# Altium PCB xiaoban.PcbDoc (part 1 of 2)
Units mm, origin at the board's own origin, x right, y up, seen from the top; angles counter-clockwise.
Board outline 80.34 x 99.39 mm, 2 copper layers (Top Layer, Bottom Layer); 120 components, 25 nets, 528 pads, 380 vias.
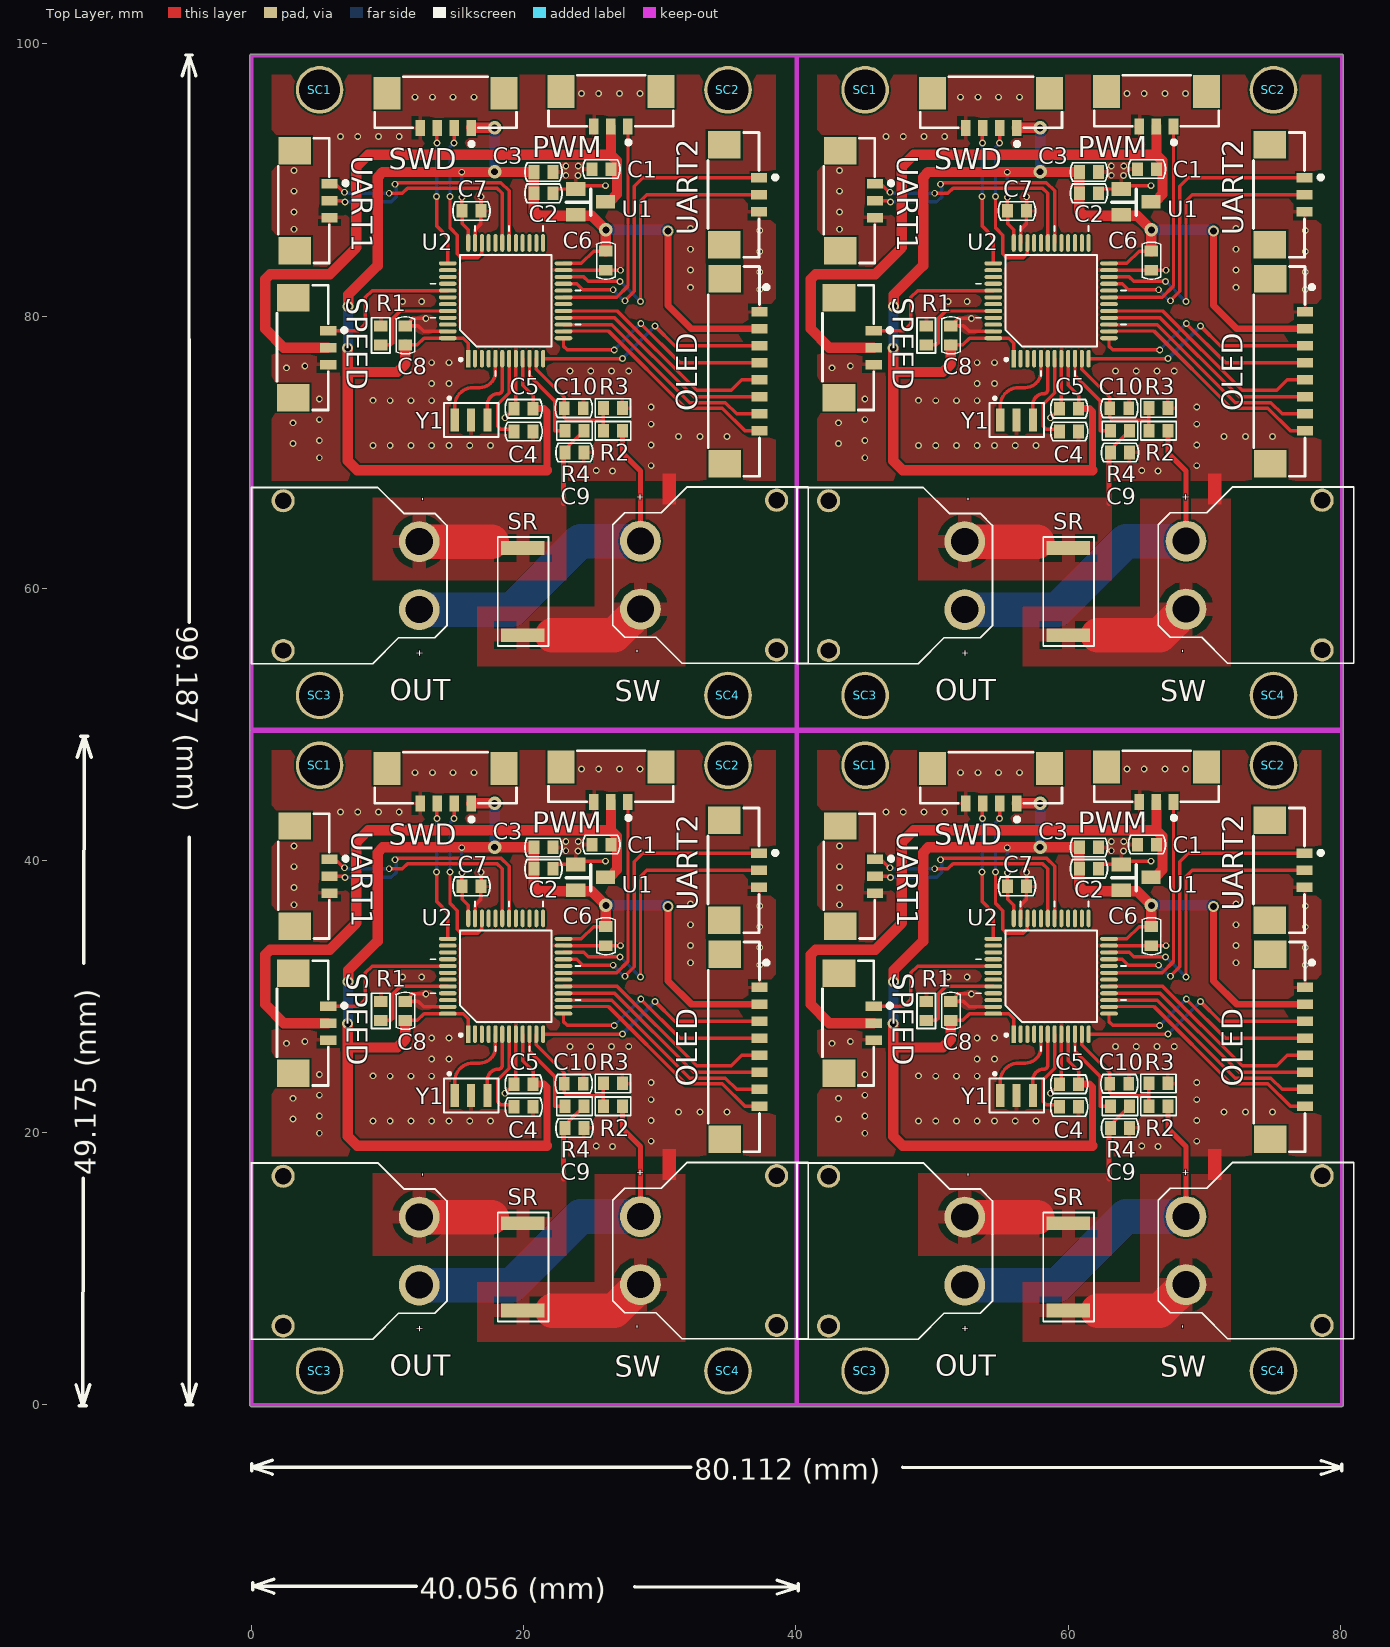
[diagram p0: Top Layer view]
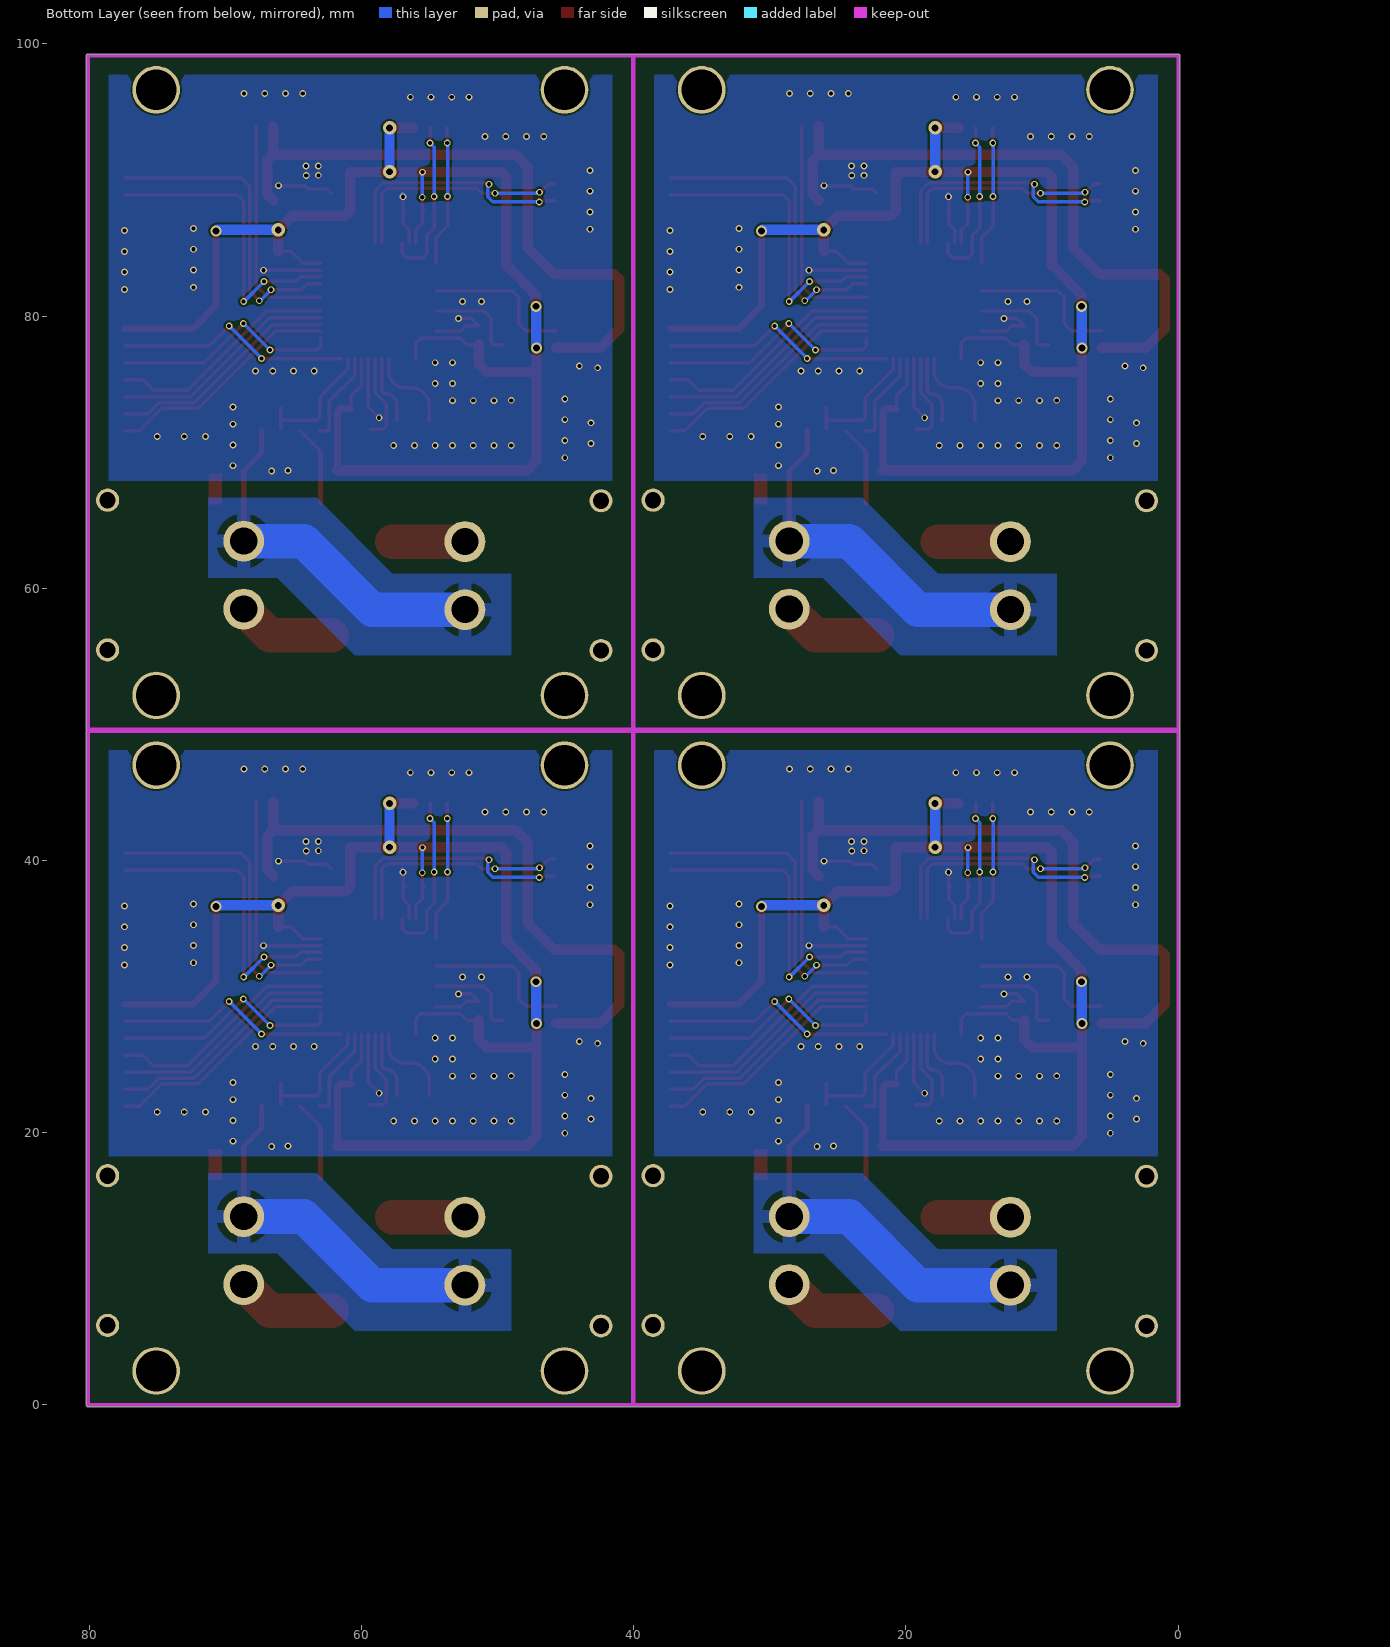
[diagram p1: Bottom Layer view, seen from below]

## Layer stack, top to bottom
Top Solder: solder mask 0.0102, Solder Resist, Dk 3.5
Top Layer: signal copper 0.0356
Dielectric 1: dielectric 0.32, FR-4, Dk 4.8
Bottom Layer: signal copper 0.0356
Bottom Solder: solder mask 0.0102, Solder Resist, Dk 3.5

## Board outline
-0.127,0 -0.127,49.5 cw(c0,49.5) -0.109,49.566 cw(c0,49.632) -0.127,49.632 -0.127,99.132 cw(c0,99.132) 0,99.259 40,99.259 cw(c40,99.132) 40.041,99.252 cw(c40.081,99.132) 40.081,99.259 80.081,99.259 cw(c80.081,99.132) 80.209,99.132 80.209,49.632 cw(c80.081,49.632) 80.19,49.566 cw(c80.081,49.5) 80.209,49.5 80.209,0 cw(c80.081,0) 80.081,-0.127 40.081,-0.127 cw(c40.081,0) 40.041,-0.121 cw(c40,0) 40,-0.127 0,-0.127 cw(c0,0)

## Design rules (kind name [scope] priority, off if disabled: settings)
Clearance [All] p1: gap=0.152
ComponentClearance [All] p1: gap=0 collisioncheckmode=3 verticalgap=0 showdistances=FALSE
HoleSize [All] p1: absolutevalues=TRUE maxlimit=5 minlimit=0.025 maxpercent=80.000 minpercent=20.000
HoleToHoleClearance [All] p1: gap=0.152 allowstackedmicrovias=TRUE
MinimumSolderMaskSliver [All] p1: minsoldermaskwidth=0
PolygonConnect PolygonConnect_3 [All vs IsVia] p1: connectstyle=Direct reliefconductorwidth=0.254 reliefentries=4 polygonreliefangle="90 Angle" airgapwidth=0.254
PolygonConnect PolygonConnect_2 [All vs (HasFootprint('R2512') OR HasFootprint('TX30-m'))] p2: connectstyle=Relief reliefconductorwidth=1.016 reliefentries=4 polygonreliefangle="90 Angle" airgapwidth=0.508
PolygonConnect PolygonConnect_1 [All vs (InNet('ADC_I') OR InNet('VCC12V'))] p3: connectstyle=Relief reliefconductorwidth=1.27 reliefentries=4 polygonreliefangle="90 Angle" airgapwidth=0.508
PolygonConnect [All] p4: connectstyle=Relief reliefconductorwidth=0.254 reliefentries=4 polygonreliefangle="90 Angle" airgapwidth=0.254
RoutingVias [All] p1: holewidth=0.3 width=0.5 viastyle="Through Hole" minholewidth=0.3 minwidth=0.5 maxholewidth=0.711 maxwidth=1.27
SilkToSilkClearance [All] p1: silktosilkclearance=0
SilkToSolderMaskClearance [IsPad] p1: minsilkscreentomaskgap=0 clearancetoexposedcopper=TRUE
SolderMaskExpansion [All] p1: expansion=0.102
Width [All] p1: maxlimit=5.08 minlimit=0.152 preferedwidth=0.254
24 further rules are at their usual default settings.

## Classes and differential pairs
component class liuyang: C1 C2 C3 C4 C5 C6 C7 C8 C9 C10 OLED OUT PWM R1 R2 R3 R4 SC1 SC2 SC3 SC4 SPEED SR SW SWD U1 U2 UART1 UART2 Y1

## Components (designator, comment, footprint, x,y, rotation, side; value= is the part's Value field where it differs from the comment)
C1 "100n" C0603 65.786,41.173 r180 top
C1 "100n" C0603 65.786,90.805 r180 top
C1 "100n" C0603 25.705,90.805 r180 top
C1 "100n" C0603 25.705,41.173 r180 top
C2 "100n" C0603 61.524,39.387 r0 top
C2 "100n" C0603 61.524,89.019 r0 top
C2 "100n" C0603 21.442,89.019 r0 top
C2 "100n" C0603 21.442,39.387 r0 top
C3 "10UF" C0603 61.524,40.962 r180 top
C3 "10UF" C0603 61.524,90.594 r180 top
C3 "10UF" C0603 21.442,90.594 r180 top
C3 "10UF" C0603 21.442,40.962 r180 top
C4 "0.1uF" C0603 60.071,21.895 r180 top
C4 "0.1uF" C0603 60.071,71.526 r180 top
C4 "0.1uF" C0603 19.99,71.526 r180 top
C4 "0.1uF" C0603 19.99,21.895 r180 top
C5 "10UF" C0603 60.071,23.571 r0 top
C5 "10UF" C0603 60.071,73.203 r0 top
C5 "10UF" C0603 19.99,73.203 r0 top
C5 "10UF" C0603 19.99,23.571 r0 top
C6 "0.1uF" C0603 66.116,34.442 r90 top
C6 "0.1uF" C0603 66.116,84.074 r90 top
C6 "0.1uF" C0603 26.035,84.074 r90 top
C6 "0.1uF" C0603 26.035,34.442 r90 top
C7 "0.1uF" C0603 56.236,38.1 r180 top
C7 "0.1uF" C0603 56.236,87.732 r180 top
C7 "0.1uF" C0603 16.154,87.732 r180 top
C7 "0.1uF" C0603 16.154,38.1 r180 top
C8 "0.1uF" C0603 51.384,28.956 r270 top
C8 "0.1uF" C0603 51.384,78.588 r270 top
C8 "0.1uF" C0603 11.303,78.588 r270 top
C8 "0.1uF" C0603 11.303,28.956 r270 top
C9 "0.1uF" C0603 63.805,20.345 r180 top
C9 "0.1uF" C0603 63.805,69.977 r180 top
C9 "0.1uF" C0603 23.724,69.977 r180 top
C9 "0.1uF" C0603 23.724,20.345 r180 top
C10 "0.1uF" C0603 63.754,23.597 r180 top
C10 "0.1uF" C0603 63.754,73.228 r180 top
C10 "0.1uF" C0603 23.673,73.228 r180 top
C10 "0.1uF" C0603 23.673,23.597 r180 top
OLED "OLED" DF13-1.25-8A 76.124,26.314 r270 top (schematic designator P0)
OLED "OLED" DF13-1.25-8A 76.124,75.946 r270 top (schematic designator P0)
OLED "OLED" DF13-1.25-8A 36.043,75.946 r270 top (schematic designator P0)
OLED "OLED" DF13-1.25-8A 36.043,26.314 r270 top (schematic designator P0)
OUT "TX60" TX30-M 52.4,11.303 r90 top
OUT "TX60" TX30-M 52.4,60.935 r90 top
OUT "TX60" TX30-M 12.319,60.935 r90 top
OUT "TX60" TX30-M 12.319,11.303 r90 top
PWM "Header 3" DF13-1.25-3A 65.862,45.593 r180 top
PWM "Header 3" DF13-1.25-3A 65.862,95.225 r180 top
PWM "Header 3" DF13-1.25-3A 25.781,95.225 r180 top
PWM "Header 3" DF13-1.25-3A 25.781,45.593 r180 top
R1 "10K" R0603 49.581,28.956 r270 top
R1 "10K" R0603 49.581,78.588 r270 top
R1 "10K" R0603 9.5,78.588 r270 top
R1 "10K" R0603 9.5,28.956 r270 top
R2 "10K" R0603 66.635,21.946 r180 top
R2 "10K" R0603 66.635,71.577 r180 top
R2 "10K" R0603 26.554,71.577 r180 top
R2 "10K" R0603 26.554,21.946 r180 top
R3 "10K" R0603 66.624,23.622 r0 top
R3 "10K" R0603 66.624,73.254 r0 top
R3 "10K" R0603 26.543,73.254 r0 top
R3 "10K" R0603 26.543,23.622 r0 top
R4 "10K" R0603 63.805,21.946 r180 top
R4 "10K" R0603 63.805,71.577 r180 top
R4 "10K" R0603 23.724,71.577 r180 top
R4 "10K" R0603 23.724,21.946 r180 top
SC1 "M3" SCRREW_M3 45.081,47 r0 top
SC1 "M3" SCRREW_M3 45.081,96.632 r0 top
SC1 "M3" SCRREW_M3 5,96.632 r0 top
SC1 "M3" SCRREW_M3 5,47 r0 top
SC2 "M3" SCRREW_M3 75.081,47 r0 top
SC2 "M3" SCRREW_M3 75.081,96.632 r0 top
SC2 "M3" SCRREW_M3 35,96.632 r0 top
SC2 "M3" SCRREW_M3 35,47 r0 top
SC3 "M3" SCRREW_M3 45.081,2.5 r0 top
SC3 "M3" SCRREW_M3 45.081,52.132 r0 top
SC3 "M3" SCRREW_M3 5,52.132 r0 top
SC3 "M3" SCRREW_M3 5,2.5 r0 top
SC4 "M3" SCRREW_M3 75.081,2.5 r0 top
SC4 "M3" SCRREW_M3 75.081,52.132 r0 top
SC4 "M3" SCRREW_M3 35,52.132 r0 top
SC4 "M3" SCRREW_M3 35,2.5 r0 top
SPEED "Header 3" DF13-1.25-3A 44.435,27.425 r270 top
SPEED "Header 3" DF13-1.25-3A 44.435,77.056 r270 top
SPEED "Header 3" DF13-1.25-3A 4.353,77.056 r270 top
SPEED "Header 3" DF13-1.25-3A 4.353,27.425 r270 top
SR "0.33R" R2512 60.02,13.335 r270 top
SR "0.33R" R2512 60.02,62.967 r270 top
SR "0.33R" R2512 19.939,62.967 r270 top
SR "0.33R" R2512 19.939,13.335 r270 top
SW "TX30" TX30-M 68.656,11.343 r270 top locked
SW "TX30" TX30-M 68.656,60.975 r270 top locked
SW "TX30" TX30-M 28.575,60.975 r270 top locked
SW "TX30" TX30-M 28.575,11.343 r270 top locked
SWD "CON4" DF13-1.25-4A 54.335,45.476 r180 top
SWD "CON4" DF13-1.25-4A 54.335,95.108 r180 top
SWD "CON4" DF13-1.25-4A 14.254,95.108 r180 top
SWD "CON4" DF13-1.25-4A 14.254,45.476 r180 top
U1 "3.3V" SOT23 64.999,38.76 r270 top
U1 "3.3V" SOT23 64.999,88.392 r270 top
U1 "3.3V" SOT23 24.917,88.392 r270 top
U1 "3.3V" SOT23 24.917,38.76 r270 top
U2 "STM32F103C8" ST_LQFP48 58.75,31.496 r90 top
U2 "STM32F103C8" ST_LQFP48 58.75,81.128 r90 top
U2 "STM32F103C8" ST_LQFP48 18.669,81.128 r90 top
U2 "STM32F103C8" ST_LQFP48 18.669,31.496 r90 top
UART1 "Header 3" DF13-1.25-3A 44.526,38.227 r270 top
UART1 "Header 3" DF13-1.25-3A 44.526,87.859 r270 top
UART1 "Header 3" DF13-1.25-3A 4.445,87.859 r270 top
UART1 "Header 3" DF13-1.25-3A 4.445,38.227 r270 top
UART2 "Header 3" DF13-1.25-3A 76.098,38.659 r270 top
UART2 "Header 3" DF13-1.25-3A 76.098,88.29 r270 top
UART2 "Header 3" DF13-1.25-3A 36.017,88.29 r270 top
UART2 "Header 3" DF13-1.25-3A 36.017,38.659 r270 top
Y1 "CSTCE8M00G55R0" CRYSMD3.2X1.3 56.21,22.733 r0 top
Y1 "CSTCE8M00G55R0" CRYSMD3.2X1.3 56.21,72.365 r0 top
Y1 "CSTCE8M00G55R0" CRYSMD3.2X1.3 16.129,72.365 r0 top
Y1 "CSTCE8M00G55R0" CRYSMD3.2X1.3 16.129,22.733 r0 top

## Footprints (in the part's own frame and the unit in brackets; to place one, negate y for a bottom-side part, rotate by r counter-clockwise, add the part's x,y. Pads: shape width x height; smd on the part's side, far side on the other; paste and mask are expansions set on the pad)
C0603 [mm]
  rect 0.8x1 smd: 1(-0.7,0) 2(0.7,0)
  Top Layer pour cut-out: -0.3,0.5 -0.3,-0.5 0.3,-0.5 0.3,0.5
  silkscreen extent -1.36,-0.68 1.36,0.68
CRYSMD3.2X1.3 [mm]
  rect 0.6x1.7 smd: 1(-1.2,0) 2(0,0) 3(1.2,0)
  Top Layer pour cut-out: 0.394,0.8 1.613,0.8 1.613,-0.8 0.394,-0.8
  Top Layer pour cut-out: -1.625,0.8 -0.406,0.8 -0.406,-0.8 -1.625,-0.8
  silkscreen extent -2,-1.25 2,1.7
DF13-1.25-3A [mm] "佳能"
  rect 0.7x1.18 smd: 1(-1.875,1.28) 2(-0.625,1.28) 3(0.625,1.28)
  rect 2x2.4 smd: NC(-4.3,-1.28) NC(3.05,-1.28)
  silkscreen extent -5.21,-2.48 3.96,2.61
DF13-1.25-4A [mm] "佳能"
  rect 0.7x1.18 smd: 1(-1.875,1.28) 2(-0.625,1.28) 3(0.625,1.28) 4(1.875,1.28)
  rect 2x2.4 smd: NC(-4.3,-1.28) NC(4.3,-1.28)
  silkscreen extent -5.21,-2.48 5.21,2.61
DF13-1.25-8A [mm]
  rect 0.7x1.18 smd: 1(-4.375,1.28) 2(-3.125,1.28) 3(-1.875,1.28) 4(-0.625,1.28) 5(0.625,1.28) 6(1.875,1.28) 7(3.125,1.28) 8(4.375,1.28)
  rect 2x2.4 smd: NC(-6.8,-1.28) NC(6.8,-1.28)
  silkscreen extent -7.71,-2.48 7.71,1.93
R0603 [mm]
  rect 0.8x1 smd: 1(-0.7,0) 2(0.7,0)
  Top Layer pour cut-out: -0.3,0.5 -0.3,-0.5 0.3,-0.5 0.3,0.5
  silkscreen extent -1.3,-0.68 1.3,0.68
R2512 [mm]
  rect 1x3.2 smd: 1(0,0) 2(6.4,0)
  silkscreen extent -0.81,-1.85 7.2,1.87
SCRREW_M3 [mm]
  round 3.5 hole 3: 0(0,0)
SOT23 [mm] "SOT23"
  rect 1x1.4 smd: 1(-0.95,-1.1) 2(0.95,-1.1) 3(0,1.1)
  silkscreen extent -0.94,-1.82 0.97,0
ST_LQFP48 [mm]
  rect 1.3x0.3 smd: 1(-4.25,2.75)
  oval 1.3x0.3 smd: 2(-4.25,2.25) 3(-4.25,1.75) 4(-4.25,1.25) 5(-4.25,0.75) 6(-4.25,0.25) 7(-4.25,-0.25) 8(-4.25,-0.75) 9(-4.25,-1.25) 10(-4.25,-1.75) 11(-4.25,-2.25) 12(-4.25,-2.75) 25(4.25,-2.75) 26(4.25,-2.25) 27(4.25,-1.75) 28(4.25,-1.25) 29(4.25,-0.75) 30(4.25,-0.25) 31(4.25,0.25) 32(4.25,0.75) 33(4.25,1.25) 34(4.25,1.75) 35(4.25,2.25) 36(4.25,2.75)
  oval 0.3x1.3 smd: 13(-2.75,-4.25) 14(-2.25,-4.25) 15(-1.75,-4.25) 16(-1.25,-4.25) 17(-0.75,-4.25) 18(-0.25,-4.25) 19(0.25,-4.25) 20(0.75,-4.25) 21(1.25,-4.25) 22(1.75,-4.25) 23(2.25,-4.25) 24(2.75,-4.25) 37(2.75,4.25) 38(2.25,4.25) 39(1.75,4.25) 40(1.25,4.25) 41(0.75,4.25) 42(0.25,4.25) 43(-0.25,4.25) 44(-0.75,4.25) 45(-1.25,4.25) 46(-1.75,4.25) 47(-2.25,4.25) 48(-2.75,4.25)
  silkscreen extent -5.52,-5.52 5.52,5.52
TX30-M [mm]
  round 1.7 hole 1.2: 0(-5.5,10) 0(5.5,10)
  round 3 hole 2: 1(-2.5,0) 2(2.5,0)
  silkscreen extent -6.48,-2.03 6.48,12.32

## Part data
C1 C1 C1 C1 C2 C2 C2 C2: library part C-EUC0603, "CAPACITOR, European symbol"
C3 C3 C3 C3 C4 C4 C4 C4 C5 C5 C5 C5 C6 C6 C6 C6 C7 C7 C7 C7 C8 C8 C8 C8 C9 C9 C9 C9 C10 C10 C10 C10: library part Cap, "Capacitor"
OLED OLED OLED OLED: library part "Header 8", "Header, 8-Pin"
OUT OUT OUT OUT SW SW SW SW: library part "Header 2", "Header, 2-Pin"
PWM PWM PWM PWM SPEED SPEED SPEED SPEED UART1 UART1 UART1 UART1 UART2 UART2 UART2 UART2: "Header, 3-Pin"
R1 R1 R1 R1 R2 R2 R2 R2 R3 R3 R3 R3 R4 R4 R4 R4: library part Res2, "Resistor"
SC1 SC1 SC1 SC1 SC2 SC2 SC2 SC2 SC3 SC3 SC3 SC3 SC4 SC4 SC4 SC4: library part Screw_M3, "Screw"
SR SR SR SR: library part R-EU_R0603, "RESISTOR, European symbol"
U1 U1 U1 U1: library part XC6206
Y1 Y1 Y1 Y1: library part XTAL-3

## Via types
v1: diameter 0.5, hole 0.3, Top Layer to Bottom Layer, tented both sides, 356 vias
v2: diameter 0.8, hole 0.5, Top Layer to Bottom Layer, tented both sides, 12 vias
v3: diameter 1, hole 0.5, Top Layer to Bottom Layer, tented both sides, 12 vias

## Nets (pads, with @x,y where several pads share a name; then routed paths per layer and width w, separated by ;. In a path a pad name is that pad's centre, name@x,y a point inside that pad or via, vN(x,y) a via of type N, cw(c..) or ccw(c..) an arc to the next point about the centre after c; other vN are vias at no path point)
ADC_C: C10.2@22.973,23.597 R2.2@25.854,21.946 R3.1@25.843,23.622 U2.11@20.919,27.246 | length 9.6
  Top Layer w0.254: U2.11@20.919,27.246 20.919,26.452 22.973,24.398 C10.2@22.973,23.597 22.973,22.925 23.165,22.733 25.843,22.733 ; R2.2@25.843,22.098 25.843,22.733 ; R3.1@25.843,23.622 25.843,22.733
ADC_I: R4.2@23.024,21.946 U2.10@20.419,27.246 | length 6.8
  Top Layer w0.254: U2.10@20.419,27.246 20.419,25.987 22.276,24.13 22.276,21.946 R4.2@23.024,21.946
BL: OLED.3@37.323,28.189 U2.12@21.419,27.246 | length 17.5
  Top Layer w0.254: U2.12@21.419,27.246 v1@27.237,27.246 ; v1(29.642,29.642) 31.094,28.189 OLED.3@37.323,28.189
  Bottom Layer w0.254: v1(27.254,27.254) v1(29.642,29.642)
CS: OLED.8@37.323,21.94 U2.14@22.919,29.246 | length 17.5
  Top Layer w0.254: U2.14@22.919,29.246 22.948,29.275 26.224,29.275 31.902,23.597 34.595,23.597 36.252,21.94 OLED.8@37.323,21.94
GND: C1.2@25.005,41.173 C2.2@22.142,39.387 C3.1@22.142,40.962 C4.1@20.69,21.895 C5.1@19.29,23.571 C6.1@26.035,33.742 C7.1@16.854,38.1 C8.1@11.303,29.656 C9.1@24.424,20.345 C10.1@24.373,23.597 OLED.1@37.323,30.689 PWM.3@25.156,44.313 R1.1@9.5,29.656 R3.2@27.243,23.622 SPEED.3@5.633,26.8 SR.2@19.939,6.935 SW.2@28.575,8.843 SWD.4@12.379,44.196 U1.1@23.817,39.71 U2.8@19.419,27.246 U2.23@22.919,33.746 U2.35@16.419,35.746 U2.47@14.419,29.246 UART1.3@5.725,37.602 UART2.3@37.297,38.034 Y1.2@16.129,22.733 | length 29.4
  Top Layer w0.254: v1(12.802,30.201) 11.848,30.201 C8.1@11.303,29.656 12.229,29.656 12.639,29.246 U2.47@14.419,29.246 ; U2.35@16.419,35.746 16.419,36.714 16.854,37.149 C7.1@16.854,37.948 ; C7.1@16.702,38.1 C7.1@16.854,37.948 ; v1(16.866,39.141) 16.866,38.111 C7.1@16.854,38.1 C7.1@16.854,37.948 ; v1(18.618,22.9) C5.1@19.29,23.571 19.419,23.7 U2.8@19.419,27.246 ; C2.2@22.142,39.387 22.465,39.71 U1.1@23.817,39.71 24.061,39.954 v1(26.01,39.954) ; U2.23@22.919,33.746 26.031,33.746 C6.1@26.035,33.742 v1(27.113,33.742)
  Top Layer w2.54: 22.098,6.909 26.641,6.909 SW.2@28.575,8.843
  Bottom Layer w0.254: v1(12.802,30.201) v1@12.852,30.15 ; v1(16.866,39.141) 16.866,39.319 v1@16.916,39.37 ; v1(27.113,33.742) v1@27.127,33.757
  other v1: 26.518,18.999 25.324,19.025 29.362,19.38 4.978,19.964 8.915,20.853 10.185,20.853 11.709,20.853 13.233,20.853 14.503,20.853 16.027,20.853 17.551,20.853 29.362,20.904 3.048,21.006 4.978,21.234 31.369,21.514 32.944,21.514 34.925,21.514 29.362,22.428 3.048,22.53 4.978,22.758 29.362,23.698 10.185,24.155 11.709,24.155 13.233,24.155 8.915,24.181 4.978,24.282 13.233,25.425 14.503,25.425 23.393,26.34 24.917,26.34 26.441,26.34 27.711,26.34 2.565,26.568 3.912,26.695 13.233,26.949 14.503,26.949 11.1,31.445 12.497,31.445 37.338,32.334 32.258,32.487 37.338,33.604 32.258,33.757 37.338,35.128 32.258,35.281 37.338,36.652 3.124,36.754 32.258,36.805 3.124,38.024 3.124,39.548 23.978,40.691 23.089,40.716 3.124,41.072 23.089,41.402 24.003,41.402 6.528,43.561 7.798,43.561 9.322,43.561 10.846,43.561 12.014,46.457 13.284,46.457 14.808,46.457 16.332,46.457 24.232,46.736 25.502,46.736 27.026,46.736 28.55,46.736
MISO: OLED.6@37.323,24.439 U2.16@22.919,30.246 | length 16.8
  Top Layer w0.254: U2.16@22.919,30.246 26.667,30.246 32.474,24.439 OLED.6@37.323,24.439
MOSI: OLED.5@37.323,25.689 U2.17@22.919,30.746 | length 17.1
  Top Layer w0.254: U2.17@22.919,30.746 26.874,30.746 32.703,24.917 35.23,24.917 36.002,25.689 OLED.5@37.323,25.689
NetC9_2: C9.2@23.024,20.345 OUT.2@12.319,13.803 R4.1@24.424,21.946 SR.1@19.939,13.335 | length 11.3
  Top Layer w0.254: C9.2@23.024,20.345 23.024,20.546 R4.1@24.424,21.946
  Top Layer w0.381: 22.922,16.6 C9.2@22.922,20.345
  Top Layer w2.54: OUT.2@12.319,13.803 17.653,13.803
NetR1_2: R1.2@9.5,28.256 U2.44@14.419,30.746 | length 7
  Top Layer w0.254: R1.2@9.5,28.256 10.222,28.256 10.389,28.423 10.389,30.201 10.934,30.746 U2.44@14.419,30.746
NetU2_5: U2.5@17.919,27.246 Y1.1@14.929,22.733 | length 6.4
  Top Layer w0.254: Y1.1@14.929,22.733 14.929,23.768 cw(c16.281,23.768) 16.281,25.121 16.764,25.121 ccw(c16.764,26.276) 17.919,26.276 U2.5@17.919,27.246
NetU2_6: U2.6@18.419,27.246 Y1.3@17.329,22.733 | length 5.1
  Top Layer w0.254: Y1.3@17.329,22.733 17.329,23.882 cw(c18.11,23.882) 18.11,24.663 ccw(c18.11,24.972) 18.419,24.972 U2.6@18.419,27.246
PWN0: PWM.1@27.656,44.313 U2.19@22.919,31.746 | length 16.8
  Top Layer w0.254: U2.19@22.919,31.746 26.818,31.746 27.656,32.584 PWM.1@27.656,44.313
REST1: C4.2@19.29,21.895 U2.7@18.919,27.246 | length 6.6
  Top Layer w0.254: U2.7@18.919,27.246 18.919,24.736 18.089,23.905 18.089,22.272 18.313,22.047 C4.2@19.29,22.047
RS: OLED.4@37.323,26.939 U2.13@22.919,28.746 | length 17.1
  Top Layer w0.254: U2.13@22.919,28.746 22.919,28.16 23.19,27.889 v1(26.645,27.889) ; v1(28.6,29.82) 31.481,26.939 OLED.4@37.323,26.939
  Bottom Layer w0.254: v1(26.645,27.889) 28.575,29.82 v1(28.6,29.82)
RX1: U2.31@18.419,35.746 UART1.1@5.725,40.102 | length 17
  Top Layer w0.254: UART1.1@5.725,40.102 6.151,40.102 6.782,39.472 v1(6.833,39.472) ; v1(10.109,39.395) 11.074,39.395 11.455,39.776 18.034,39.776 18.419,39.391 U2.31@18.419,35.746
  Bottom Layer w0.254: v1(6.833,39.472) 6.833,39.421 6.858,39.395 v1(10.109,39.395)
RX2: U2.22@22.919,33.246 UART2.2@37.297,39.284 | length 22.7
  Top Layer w0.254: U2.22@22.919,33.246 24.412,33.246 24.74,32.918 v1(27.076,32.918) ; v1(28.575,31.445) 28.575,38.811 29.048,39.284 UART2.2@37.297,39.284
  Bottom Layer w0.254: v1(27.076,32.918) 28.55,31.445 v1(28.575,31.445)
SCK: OLED.7@37.323,23.19 U2.15@22.919,29.746 | length 17.1
  Top Layer w0.254: U2.15@22.919,29.746 26.46,29.746 32.192,24.014 34.813,24.014 35.637,23.19 OLED.7@37.323,23.19
SPEED: SPEED.1@5.633,29.3 U2.41@14.419,32.246 | length 11.2
  Top Layer w0.254: SPEED.1@5.598,29.307 7.844,29.307 8.357,29.82 8.357,31.75 8.853,32.246 U2.41@14.419,32.246
SWCLK: SWD.3@13.629,44.196 U2.37@14.419,34.246 | length 10.4
  Top Layer w0.254: v1(13.589,39.167) 13.589,37.008 14.419,36.178 U2.37@14.419,34.246 ; v1(13.614,43.078) 13.614,44.058 13.691,44.134 SWD.3@13.629,44.196
  Bottom Layer w0.254: v1(13.589,39.167) 13.589,43.002 13.64,43.053 v1(13.614,43.078)
SWDIO: SWD.2@14.879,44.196 U2.34@16.919,35.746 | length 12.4
  Top Layer w0.254: v1(14.58,39.167) 14.58,36.855 15.113,36.322 15.113,34.95 15.39,34.674 16.612,34.674 16.919,34.981 U2.34@16.919,35.746 ; v1(14.879,43.084) SWD.2@14.879,44.196
  Bottom Layer w0.254: v1(14.58,39.167) 14.58,42.785 v1(14.879,43.084)
TX1: U2.30@18.919,35.746 UART1.2@5.725,38.852 | length 18.6
  Top Layer w0.254: UART1.2@5.725,38.852 6.792,38.852 6.858,38.786 v1(6.858,38.76) ; v1(10.541,40.056) 10.668,40.183 18.313,40.183 18.919,39.577 U2.30@18.919,35.746
  Bottom Layer w0.254: v1(6.858,38.76) 10.266,38.76 10.647,39.141 10.639,39.149 10.639,39.958 v1(10.541,40.056)
TX2: U2.21@22.919,32.746 UART2.1@37.297,40.534 | length 23.1
  Top Layer w0.254: U2.21@22.919,32.746 23.896,32.746 24.333,32.309 v1(26.568,32.309) ; v1(27.432,31.496) 28.118,32.182 28.118,39.903 28.748,40.534 UART2.1@37.297,40.534
  Bottom Layer w0.254: v1@26.594,32.258 27.356,31.496 v1(27.432,31.496)
VCC12V: OUT.1@12.319,8.803 R2.1@27.254,21.946 SW.1@28.575,13.843 | length 27
  Top Layer w0.381: R2.1@27.254,21.946 27.254,20.32 28.575,18.999 SW.1@28.575,13.843
  Bottom Layer w2.54: OUT.1@12.319,8.803 19.115,8.803 24.155,13.843 SW.1@28.575,13.843
VDD_3V3: C2.1@20.742,39.387 C3.2@20.742,40.962 C5.2@20.69,23.571 C6.2@26.035,35.142 C7.2@15.454,38.1 C8.2@11.303,28.256 OLED.2@37.323,29.439 SWD.1@16.129,44.196 U1.2@23.817,37.81 U2.1@15.919,27.246 U2.9@19.919,27.246 U2.24@22.919,34.246 U2.36@15.919,35.746 U2.48@14.419,28.746 | length 111.5
  Top Layer w0.254: C8.2@11.303,28.256 12.178,28.256 12.668,28.746 U2.48@14.419,28.746 15.552,28.746 15.919,28.379 U2.1@15.919,27.246 ; C7.2@15.302,38.1 15.469,37.933 15.469,37.16 15.919,36.71 U2.36@15.919,35.746 ; C7.2@15.454,38.1 v1(15.454,39.102) ; U2.9@19.919,27.246 19.919,25.293 20.69,24.522 C5.2@20.69,23.571 ; U2.24@22.919,34.246 24.232,34.246 25.128,35.142 C6.2@26.035,35.142
  Top Layer w0.508: C5.2@20.69,23.571 21.488,23.571 21.692,23.368 21.692,19.05 ; v2(30.607,36.627) 30.607,31.14 32.308,29.439 OLED.2@37.323,29.439
  Top Layer w0.762: v2(7.061,28.016) 7.061,26.264 ; v2(7.087,31.09) 7.112,31.115 7.112,31.953 9.22,34.061 9.271,34.061 9.271,40.589 9.644,40.962 17.856,40.962 C3.2@20.742,40.962 C2.1@20.742,39.387 20.742,38.084 21.092,37.734 25.004,37.734 v3(26.035,36.703) C6.2@26.035,35.142 ; C8.2@11.303,28.256 11.303,26.848 10.719,26.264 7.061,26.264 ; SWD.1@16.129,44.196 v3(17.856,44.196) ; 21.692,19.05 7.747,19.05 7.061,19.736 7.061,26.264
  Bottom Layer w0.254: v1(15.443,40.945) 15.454,40.934 v1(15.454,39.102)
  Bottom Layer w0.762: v2(7.061,28.016) v2@7.087,28.042 ; v2@7.087,28.016 v2@7.087,28.042 ; v2(7.087,31.09) v2@7.087,28.042 ; v3(17.856,40.97) v3(17.856,44.196) ; v3(26.035,36.703) 30.531,36.703 v2(30.607,36.627)
VIN: C1.1@26.405,41.173 PWM.2@26.406,44.313 SPEED.2@5.633,28.05 U1.3@26.017,38.76 | length 47.3
  Top Layer w0.762: SPEED.2@5.598,28.057 2.372,28.057 0.991,29.439 0.991,33.071 1.372,33.452 5.74,33.452 7.696,35.408 7.696,41.326 8.585,42.215 26.406,42.215 ; U1.3@26.379,38.843 26.848,39.311 26.848,41.773 26.406,42.215 ; PWM.2@26.406,44.313 26.406,42.215